# Altium PCB MainPCB.PcbDoc (part 2 of 4)
Units mm, origin at the board's own origin, x right, y up, seen from the top; angles counter-clockwise.
Board outline 219.96 x 164.97 mm, 2 copper layers (Top Layer, Bottom Layer); 298 components, 220 nets, 976 pads, 1045 vias.
Unrouted connection lines stored in the file: 1.
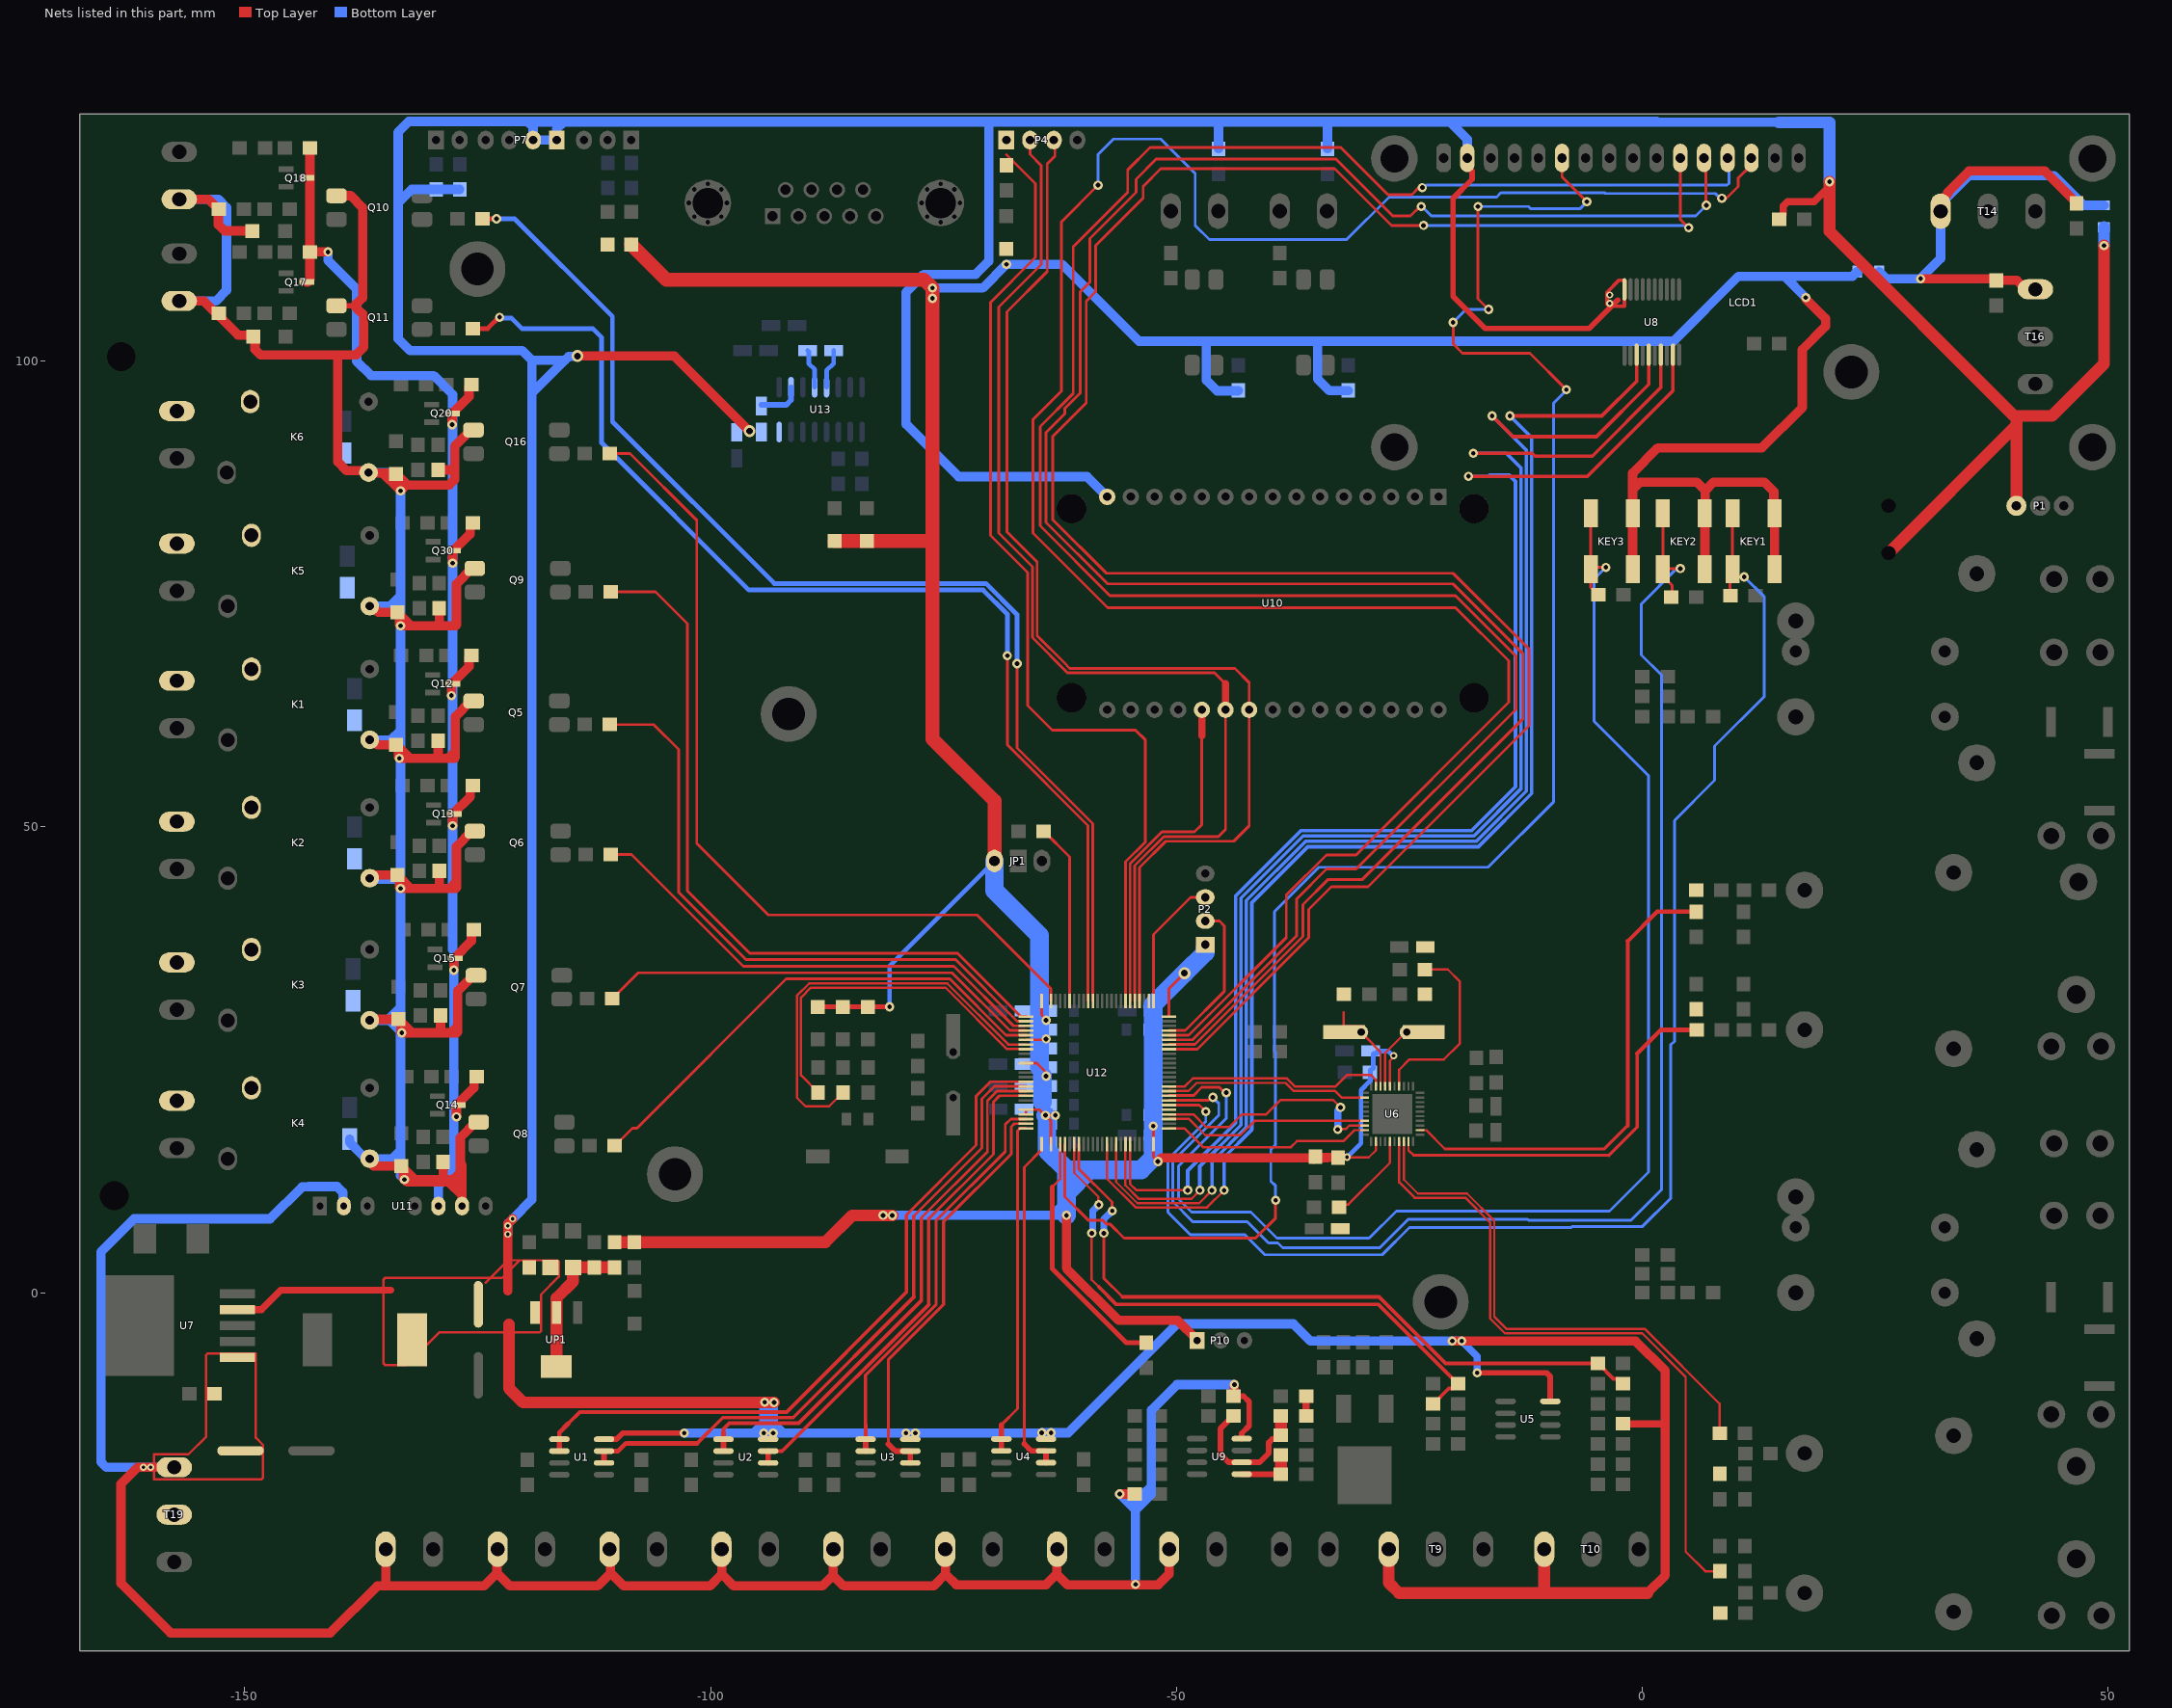
[diagram p2: the nets of this part, all layers, seen from the top]

## Via types
v1: diameter 0.762, hole 0.381, Top Layer to Bottom Layer, tented both sides, 733 vias
v2: diameter 1, hole 0.5, Top Layer to Bottom Layer, tented both sides, 230 vias
v3: diameter 1, hole 0.5, Top Layer to Bottom Layer, 35 vias
v4: diameter 1.2, hole 0.6, Top Layer to Bottom Layer, tented both sides, 28 vias
v5: diameter 0.8, hole 0.4, Top Layer to Bottom Layer, tented both sides, 10 vias
v6: diameter 1.27, hole 0.711, Top Layer to Bottom Layer, tented both sides, 4 vias
v7: diameter 0.6, hole 0.3, Top Layer to Bottom Layer, tented both sides, 3 vias
v8: diameter 1.27, hole 0.711, Top Layer to Bottom Layer, 1 vias
v9: diameter 0.9, hole 0.45, Top Layer to Bottom Layer, tented both sides, 1 vias

## Nets (pads, with @x,y where several pads share a name; then routed paths per layer and width w, separated by ;. In a path a pad name is that pad's centre, name@x,y a point inside that pad or via, vN(x,y) a via of type N, cw(c..) or ccw(c..) an arc to the next point about the centre after c; other vN are vias at no path point)
3.3v-ADE: C25.1 C26.2 C27.1 C29.2 C36.2 C37.2 C38.2 C39.2 C40.2 C41.1 C43.2 C44.2 C45.2 C46.2 C52.1 C53.1 C54.1 C55.1 C56.1 D15.1 D16.1 D17.1 D18.1 D19.1 D20.1 D24.1 D25.1 JP1.3 KEY1.2 KEY2.2 KEY3.2 P2.1 P10.1 R18.2 R20.2 R29.2 R30.2 R44.2 R94.2 U6.2 U6.26 U12.6 U12.11 U12.21 U12.22 U12.28 U12.50 U12.75 U12.100 | length 563.7
  Top Layer w0.25: R44.2@-32.681,14.511 -32.658,14.534 v5(-31.703,14.534) -31.68,14.511 -29.382,14.511 -28.61,15.283 U6.2@-28.61,16.218 ; U6.26@-27.11,22.166 -27.11,24.878 -26.703,25.285 v5(-26.703,25.434)
  Top Layer w0.3: U12.22@-66.163,19.137 U12.21@-66.163,19.637 -64.73,19.637 v2@-64.096,19.002 ; U12.11@-66.163,24.637 -65.006,24.637 v2@-63.603,23.234 ; U12.6@-66.163,27.137 -63.9,27.137 v2@-63.803,27.234 ; U12.100@-64.493,31.947 -64.483,31.937 U12.100@-64.483,31.317 -64.483,29.814 v2@-63.903,29.234 ; U12.28@-63.483,15.957 -63.483,18.453 v2(-64.064,19.034) v2(-63.003,19.034) ; v2@-52.483,17.881 U12.50@-52.483,15.957 -52.483,14.564 v2(-52.003,14.084) ; U12.75@-50.803,29.637 -50.803,32.636 v6(-49.149,34.29)
  Top Layer w0.5: D25.1@-88.503,30.684 D24.1@-85.803,30.684 D15.1@-83.103,30.684 v2(-80.803,30.684)
  Top Layer w1: v2(-61.817,8.301) -61.817,2.619 -56.227,-2.971 -49.892,-2.971 -47.797,-5.066 P10.1@-47.797,-5.13 ; v2(-52.003,14.084) -51.617,14.47 -35.34,14.47 -35.312,14.442 -35.312,14.298 C27.1@-35.076,14.534 ; C27.1@-35.115,14.573 C27.1@-35.076,14.534 ; -33.886,14.534 R44.2@-32.658,14.534 ; -33.845,14.493 -35.035,14.493 C27.1@-35.076,14.534 ; KEY3.2@-1.052,77.645 KEY3.2@-1.052,83.645 -1.052,87.975 1.651,90.678 12.827,90.678 17.145,94.996 17.145,101.219 19.652,103.726 19.652,104.554 17.526,106.68 v3(17.526,106.807) ; -1.052,86.197 -0.254,86.995 5.842,86.995 6.731,86.106 ; KEY2.2@6.695,83.645 6.695,77.633 KEY2.2@6.731,77.597 ; KEY2.2@6.731,83.693 6.731,86.106 ; KEY1.2@14.188,83.645 14.188,77.633 KEY1.2@14.224,77.597 ; KEY1.2@14.224,83.566 14.097,83.693 14.097,85.979 13.081,86.995 7.62,86.995 6.731,86.106
  Top Layer w1.27: R29.2@-110.331,5.413 R30.2@-108.172,5.413 -87.692,5.413 -84.82,8.285 v2(-80.502,8.285)
  Top Layer w1.5: D18.1@-108.521,112.492 -104.763,108.734 -77.103,108.734 v2(-76.203,107.834) v2(-76.203,106.734) -76.203,80.734 -76.203,80.688 ; D20.1@-86.677,80.688 D19.1@-83.248,80.688 -76.203,80.688 ; JP1.3@-69.543,46.334 -69.543,52.774 -76.203,59.434 -76.203,80.688
  Bottom Layer w0.5: v2(-80.803,30.684) -80.803,35.074 JP1.3@-69.543,46.334 ; v5(-31.703,14.534) -30.203,16.034 -30.203,21.734 -29.203,22.734 C26.2@-29.203,23.934 ; C26.2@-28.903,24.034 -28.903,25.598 -28.85,25.65 -28.461,25.65 -28.461,25.888 -28.408,25.941 -27.291,25.941 -26.784,25.434 v5(-26.703,25.434)
  Bottom Layer w1: v2(-81.502,8.301) v2@-80.518,8.301 ; v2(-80.502,8.285) v2@-80.518,8.301 ; v2(-76.203,106.734) v2(-76.203,107.834) -70.806,107.834 v2(-68.262,110.378) -62.293,110.378 -54.038,102.123 -46.799,102.123 ; v2(-61.817,8.301) -63.327,8.301 ; -61.803,9.825 -63.327,8.301 ; R18.2@-43.37,96.836 -43.417,96.789 -45.656,96.789 -46.799,97.932 -46.799,102.123 ; R20.2@-31.559,96.836 -33.638,96.836 -34.861,98.059 -34.861,102.123 ; 13.462,109.084 10.296,109.084 3.336,102.123 -34.861,102.123 ; 13.462,109.093 15.24,109.093 v3(17.526,106.807) ; 15.24,109.084 22.533,109.084 22.9,109.451 23.025,109.451 23.05,109.476 R94.2@23.05,109.601 ; v2@-80.518,8.301 -63.327,8.301 ; -46.799,102.123 -34.861,102.123
  Bottom Layer w2: JP1.3@-69.543,46.334 -69.543,43.174 -64.703,38.334 -64.703,30.241 ; -64.703,24.199 -64.703,29.834 ; -64.403,20.434 v2@-64.403,23.289 ; v2(-64.064,19.034) -63.903,18.873 -63.903,15.284 -61.803,13.184 ; v2(-61.817,8.301) -61.803,8.315 -61.803,9.825 -61.803,10.714 ; P2.1@-46.926,37.034 -46.926,36.513 v6(-49.149,34.29) -52.514,30.925 C56.1@-52.514,30.241 -52.503,30.23 v2(-52.503,17.881) -52.503,14.484 -53.803,13.184 -59.333,13.184 ; -61.803,10.714 -61.803,13.184 ; -61.803,10.714 -59.333,13.184 ; -61.803,13.184 -59.333,13.184
  other v2: -64.003,23.234 -64.003,27.234 -64.003,29.234
3v3: C6.2 C7.2 R29.1 UP1.2 UP1.4 | length 16.3
  Top Layer w1: C6.2@-115.151,2.388 -114.826,2.713 C6.2@-114.776,2.713
  Top Layer w1.27: UP1.4@-116.554,-7.934 UP1.2@-116.554,-2.134 -116.554,-0.589 -114.776,1.189 C6.2@-114.776,2.713 C7.2@-112.49,2.713 R29.1@-110.331,2.713
5-volt: 1.2 C4.2 C5.2 C9.1 C50.1 L1.1 LCD1.2 P1.1 P7.1 P7.2 R23.2 R32.2 R86.2 R87.2 R95.2 R100.2 R101.2 T9.1 T10.1 T18.2 U1.8 U2.8 U3.8 U4.8 U5.8 U7.4 U8.20 U10.15 U13.16 UP1.3 | length 1017.2
  Top Layer w0.254: L1.1@-132.048,-5.067 -132.048,-6.337 L1.1@-131.62,-6.765 ; L1.1@-130.587,-7.798 L1.1@-131.62,-6.765 ; -124.174,1.062 -123.666,1.57 ; L1.1@-131.62,-6.765 -129.127,-4.272 -121.634,-4.272 -118.354,-4.272 -118.205,-4.123 -118.205,-0.208 -116.3,1.697 -116.3,3.326 -116.449,3.475 -120.491,3.475 ; L1.1@-131.62,-6.765 -132.619,-7.764 -134.947,-7.764 -135.096,-7.616 -135.096,0.267 -135.096,1.421 -134.947,1.57 -123.666,1.57 ; -123.666,1.57 -121.761,3.475 -120.491,3.475 ; -123.666,1.57 -122.396,1.57 -121.761,2.205 -120.491,3.475
  Top Layer w0.381: v1@-3.803,106.107 -3.803,107.384 -2.503,108.684 -2.491,108.672 -1.96,108.672 -1.928,108.64 U8.20@-1.928,107.684 -1.928,105.884 -3.58,105.884 v1@-3.803,106.107
  Top Layer w0.6: LCD1.2@-18.669,121.793 -18.669,120.781 -18.288,120.4 -18.288,119.507 -20.32,117.475 -20.32,106.934 -16.891,103.505 -5.715,103.505 -2.667,106.553
  Top Layer w0.61: U1.8@-111.442,-15.733 -110.108,-15.733 -109.442,-15.067 v2(-102.838,-15.067) ; v2(-17.748,-8.607) -10.297,-8.607 -9.887,-9.017 U5.8@-9.887,-11.671
  Top Layer w0.762: U7.4@-152.191,-1.81 -148.222,-1.81 -146.145,0.267 -135.096,0.267 -134.334,0.267 ; R32.2@-2.094,-14.084 2.318,-14.084 2.445,-14.211 ; R23.2@14.652,115.189 14.702,115.189 15.046,115.533 15.046,115.583 15.113,115.65 15.113,116.648 15.559,117.094 18.415,117.094 20.066,118.745 v3@20.066,119.38
  Top Layer w1: -121.761,0.173 -121.761,2.205 -121.761,3.475 v1(-121.761,6.269) v1(-121.761,7.158) -121.761,7.412 v1(-121.253,7.92) ; v6(-114.303,100.534) -103.884,100.534 v6(-95.821,92.471) ; v2(-20.415,-5.194) v2(-19.399,-5.194) -0.73,-5.194 2.445,-8.369 2.445,-14.211 2.445,-30.34 0.54,-32.245
  Top Layer w1.27: -121.634,-3.416 -121.634,-4.272 -121.634,-10.274 -120.127,-11.781 v2(-93.202,-11.781) ; T9.1@-27.241,-27.544 -27.241,-31.134 -26.13,-32.245 -10.54,-32.245 ; T10.1@-10.54,-27.544 -10.54,-32.245 ; 0.54,-32.245 -10.54,-32.245 ; v3(20.066,119.253) 20.066,113.919 39.878,94.107 ; T18.2@26.416,79.375 39.878,92.837 ; P1.1@40.132,84.455 40.132,93.98 40.005,94.107 39.878,94.107 ; v3(49.53,112.395) 49.53,99.695 43.942,94.107 39.878,94.107
  Bottom Layer w0.762: v2(-19.399,-5.194) -17.748,-6.845 v2(-17.748,-8.607)
  Bottom Layer w1: R86.2@-126.936,118.426 R87.2@-129.476,118.426 -132.096,118.426 -133.54,116.982 ; v1(-121.761,6.269) v1(-121.761,7.158) -121.761,7.412 v1(-121.253,7.92) -119.189,9.984 ; -119.189,9.952 -119.189,9.984 ; -119.189,10.46 -119.189,9.984 ; v6(-114.303,100.534) -114.355,100.482 -115.242,100.482 -115.633,100.091 ; v2@-102.838,-15.066 -95.345,-15.066 ; v2@-64.463,-15.066 v2(-78.037,-15.066) v2(-79.037,-15.066) -92.279,-15.066 ; v2(-64.463,-15.043) v2(-63.463,-15.043) -61.63,-15.043 -49.939,-3.352 -37.464,-3.352 -35.622,-5.194 v2(-20.415,-5.194) v2(-19.399,-5.194) ; U10.15@-57.449,85.421 -59.608,87.58 -73.387,87.58 -79.039,93.232 -79.039,107.392 -77.134,109.297 -71.546,109.297 -70.149,110.694 -70.149,125.634 ; R101.2@-45.503,122.784 -45.503,125.634 ; R100.2@-33.803,122.784 -33.803,125.634 ; LCD1.2@-18.669,121.666 LCD1.2@-18.796,121.793 -18.796,123.802 -20.701,125.707 ; 1.524,125.707 -20.701,125.707 ; 14.609,125.599 14.574,125.634 -33.803,125.634 ; -133.54,116.982 -133.54,124.564 -132.397,125.707 -119.648,125.707 ; -133.54,116.982 -133.54,102.377 -132.27,101.107 -120.205,101.107 -119.189,100.091 ; -119.648,125.707 -20.701,125.707 ; -119.648,125.707 -119.575,125.634 ; -119.575,125.634 -115.803,125.634 ; -119.575,125.634 -119.062,125.121 P7.2@-119.062,123.713 P7.1@-116.522,123.713 -116.522,124.915 -115.803,125.634 ; -119.189,9.984 -119.189,94.808 -119.189,96.535 ; -119.189,96.535 -115.633,100.091 ; -119.189,96.535 -119.189,100.091 ; -119.189,100.091 -115.633,100.091 ; -115.803,125.634 -70.149,125.634 ; -95.345,-15.066 v2(-94.294,-15.066) ; -95.345,-15.066 -94.33,-14.051 -94.294,-14.051 ; v2(-94.294,-15.066) -94.294,-14.051 ; v2(-94.294,-15.066) v2(-93.294,-15.066) ; -94.294,-14.051 -94.294,-11.857 v2(-94.202,-11.765) -94.186,-11.781 v2(-93.202,-11.781) -93.294,-11.873 -93.294,-14.051 ; -94.294,-14.051 -93.294,-14.051 ; v2(-93.294,-15.066) -93.294,-14.051 ; v2(-93.294,-15.066) -92.279,-15.066 ; -93.294,-14.051 -92.279,-15.066 ; -70.149,125.634 -45.503,125.634 ; -45.503,125.634 -33.803,125.634
  Bottom Layer w1.27: 14.609,125.599 20.066,125.599 v3(20.066,119.253) ; v3(49.53,112.395) R95.2@49.53,114.363
  other v1: -3.503,106.184 -3.503,107.084
5v-out-relay: Q12.3 Q13.3 Q14.3 Q15.3 Q17.3 Q18.3 Q20.3 Q30.3 R15.2 R16.2 R45.2 R46.2 R48.2 R49.2 R54.2 R55.2 U11.6 | length 160.6
  Top Layer w1: Q17.3@-143.362,108.473 -143.262,108.473 -143.014,108.721 R55.2@-143.014,111.71 ; R54.2@-143.014,122.886 R55.2@-143.014,111.71 ; v2(-141.062,111.71) R55.2@-143.014,111.71 ; v2(-127.818,64.086) -127.818,65.323 -125.93,67.211 -125.93,68.178 -125.705,68.403 R45.2@-125.655,68.403 ; v2(-127.741,93.182) Q20.3@-127.741,94.376 -125.937,96.18 -125.937,97.261 -125.712,97.486 R16.2@-125.662,97.486 ; v2(-127.698,78.31) -127.698,79.547 -125.81,81.435 -125.81,82.402 -125.585,82.627 R15.2@-125.535,82.627 ; v2(-127.691,50.116) -127.691,51.353 -125.803,53.241 -125.803,54.208 -125.578,54.433 R46.2@-125.528,54.433 ; v2(-127.564,34.622) -127.564,35.859 -125.676,37.747 -125.676,38.714 -125.451,38.939 R48.2@-125.401,38.939 ; v2(-127.282,18.874) -127.282,20.111 -125.394,21.999 -125.394,22.966 -125.169,23.191 R49.2@-125.119,23.191
  Bottom Layer w1: v2(-141.062,111.71) -141.062,110.788 -137.985,107.711 -137.985,99.964 -136.461,98.44 -129.73,98.44 -127.698,96.408 -127.698,93.182 -127.698,81.232 v2(-127.698,78.31) -127.698,64.206 v2(-127.818,64.086) -127.691,63.959 -127.691,36.838 ; U11.6@-129.222,9.286 -129.222,11.445 -127.571,13.096 -127.571,21.732 -127.571,36.718 ; v2(-127.741,93.182) v2@-127.727,93.168
12-volt: C8.1 C10.2 C31.2 R105.1 T1.1 T2.1 T3.1 T4.1 T5.1 T6.1 T7.1 T8.1 T19.1 U7.1 U9.8 U11.2 | length 320.8
  Top Layer w0.254: -159.734,-20.02 -159.734,-18.75 -159.734,-17.353 -156.051,-17.353 -154.146,-15.448 -154.146,-6.691 -153.997,-6.542 -148.812,-6.542 -148.812,-6.691 -148.812,-15.575 -148.05,-16.337 -148.05,-19.871 -148.199,-20.02 -159.734,-20.02
  Top Layer w0.61: C31.2@-43.903,-11.116 -42.803,-11.116 -42.213,-11.706 -42.213,-14.305 -43.003,-15.096 U9.8@-43.003,-15.676
  Top Layer w1: T19.1@-157.575,-18.75 -159.734,-18.75 -161.512,-18.75 -163.29,-20.528 -163.29,-31.196 -157.956,-36.53 -140.81,-36.53 -135.761,-31.481 -134.872,-31.481 ; T1.1@-134.872,-27.545 -134.872,-31.481 ; T2.1@-122.934,-28.233 -122.934,-30.084 ; T2.1@-122.861,-28.233 T2.1@-122.861,-27.545 ; T3.1@-110.851,-27.545 -110.742,-27.654 -110.742,-30.084 ; T4.1@-98.84,-27.545 -98.804,-27.581 -98.804,-30.211 ; T5.1@-86.83,-27.545 -86.866,-27.581 -86.866,-30.338 ; T6.1@-74.819,-27.545 -74.801,-27.563 -74.801,-30.211 ; T7.1@-62.809,-27.545 -62.863,-27.6 -62.863,-30.211 ; v2(-56.103,-21.616) R105.1@-54.503,-21.616 ; T8.1@-50.798,-27.545 -50.798,-30.211 -51.941,-31.354 -61.72,-31.354 -62.863,-30.211 ; C31.2@-43.903,-11.116 -43.803,-11.016 v2(-43.803,-9.88) ; -134.872,-31.481 -124.331,-31.481 -122.934,-30.084 ; -122.934,-30.084 -121.537,-31.481 -112.139,-31.481 -110.742,-30.084 ; -110.742,-30.084 -109.345,-31.481 -100.074,-31.481 -98.804,-30.211 ; -98.804,-30.211 -97.534,-31.481 -88.009,-31.481 -86.866,-30.338 ; -86.866,-30.338 -85.723,-31.481 -76.071,-31.481 -74.801,-30.211 ; -74.801,-30.211 -73.658,-31.354 -64.006,-31.354 -62.863,-30.211
  Bottom Layer w1: T19.1@-157.575,-18.75 v1(-160.115,-18.75) v1(-160.877,-18.75) -164.863,-18.75 -165.449,-18.164 -165.449,4.364 -161.893,7.92 -147.288,7.92 -143.859,11.349 -143.165,11.349 -143.128,11.386 -140.1,11.386 -139.478,10.763 -139.478,9.382 U11.2@-139.382,9.286 ; v2(-54.403,-31.316) -54.403,-23.316 ; -52.703,-20.316 -52.703,-20.766 ; v2(-43.803,-9.88) -49.967,-9.88 -52.703,-12.616 -52.703,-20.766 ; -54.403,-23.316 -52.703,-21.616 ; -54.403,-23.316 -54.403,-21.616 ; -54.403,-23.316 v2(-56.103,-21.616) -54.403,-21.616 ; -54.403,-21.616 -53.553,-21.616 ; -53.553,-21.616 -52.703,-21.616 ; -53.553,-21.616 -52.703,-20.766 ; -52.703,-21.616 -52.703,-20.766
#DB1: R96.1 U12.7 | length 44.8
  Top Layer w0.25: R96.1@-85.803,21.484 -85.803,21.434 -86.403,20.834 -86.453,20.834 -87.278,20.009 -89.828,20.009 -90.753,20.934 -90.753,31.87 -89.428,33.195 -74.614,33.195 -68.056,26.637 U12.7@-66.163,26.637
#DB2: R97.1 U12.8 | length 38.3
  Top Layer w0.25: R97.1@-88.503,21.484 -88.503,21.534 -90.303,23.334 -90.303,31.684 -89.242,32.745 -74.8,32.745 -68.192,26.137 U12.8@-66.163,26.137
#NodeMCU-SS: U10.20 U12.81 | length 39.3
  Top Layer w0.3: U12.81@-54.983,31.317 -54.983,46.037 -51.564,49.456 -48.075,49.456 -47.289,50.242 U10.20@-47.289,62.561
  Top Layer w0.762: -47.289,59.767 U10.20@-47.289,62.561
#TACHO1: U8.3 U12.40 | length 144.8
  Top Layer w0.254: U12.40@-57.483,15.957 -57.483,12.238 -54.394,9.149 -46.727,9.149 -44.903,10.973 v2(-44.903,10.984)
  Top Layer w0.381: v2(-14.224,94.107) -4.358,94.107 -0.628,97.837 U8.3@-0.628,100.684
  Bottom Layer w0.381: v2(-44.903,10.984) -44.903,14.527 -41.927,17.503 -41.927,41.858 -35.926,47.858 -17.608,47.858 -11.885,53.581 -11.885,91.768 v2(-14.224,94.107)
#TACHO2: U8.5 U12.42 | length 148.5
  Top Layer w0.254: U12.42@-56.483,15.957 -56.483,11.88 -54.206,9.603 -47.573,9.603 -46.203,10.973 v2(-46.203,10.984)
  Top Layer w0.381: v2(-16.129,94.107) -14.614,92.592 -13.906,91.884 -4.938,91.884 0.672,97.494 U8.5@0.672,100.684
  Bottom Layer w0.381: v2(-46.203,10.984) -46.203,14.048 -42.508,17.743 -42.508,42.099 -36.167,48.439 -17.848,48.439 -12.466,53.821 -12.466,90.444 v2(-16.129,94.107)
#TACHO3: U8.7 U12.44 | length 148.6
  Top Layer w0.254: U12.44@-55.483,15.957 -55.483,11.522 -54.018,10.057 -48.419,10.057 -47.503,10.973 v2(-47.503,10.984)
  Top Layer w0.381: v2(-18.161,90.106) -11.85,90.106 -11.533,89.789 -5.39,89.789 1.972,97.151 U8.7@1.972,100.684
  Bottom Layer w0.381: v2(-47.503,10.984) -47.503,13.57 -43.089,17.984 -43.089,42.339 -36.408,49.02 -18.089,49.02 -13.047,54.062 -13.047,88.548 -14.605,90.106 v2(-18.161,90.106)
#TACHO4: U8.9 U12.45 | length 147.7
  Top Layer w0.254: -54.983,13.811 -54.983,13.291 ; U12.45@-54.983,15.957 -54.983,13.291 ; v2(-48.803,10.984) -54.303,10.984 -54.983,11.664 -54.983,13.291
  Top Layer w0.381: v2(-18.669,87.63) -5.905,87.63 3.272,96.807 U8.9@3.272,100.684
  Bottom Layer w0.381: v2(-48.803,10.984) -48.803,13.092 -43.67,18.225 -43.67,42.58 -36.648,49.601 -18.33,49.601 -13.628,54.303 -13.628,87.066 -14.346,87.784 -16.347,87.784 -16.501,87.63 v2(-18.669,87.63)
@DAC-OUT: R116.2 U12.30 | length 31.7
  Top Layer w0.254: -63.341,11.349 -62.483,12.207 ; -62.483,15.032 -62.483,12.207 ; U12.30@-62.483,15.957 -62.483,12.207
  Top Layer w0.508: -63.341,11.349 -63.341,2.586 ; -62.071,1.316 -63.341,2.586 ; R116.2@-53.258,-5.384 -55.371,-5.384 -63.341,2.586
ADC1: U1.1 U1.2 U12.15 | length 76.4
  Top Layer w0.3: -78.993,8.334 -71.503,15.824 -71.503,21.096 -69.962,22.637 U12.15@-66.163,22.637
  Top Layer w0.35: -78.993,0.044 -78.993,8.334
  Top Layer w0.4: -115.278,-14.041 -114.053,-12.816 -91.853,-12.816 -78.993,0.044
  Top Layer w0.5: U1.1@-116.242,-15.733 -116.242,-15.005 -115.278,-14.041
  Top Layer w0.6: U1.2@-116.242,-17.003 U1.1@-116.242,-15.733 U1.1@-115.442,-15.733
ADC2: U1.6 U1.7 U12.16 | length 70.9
  Top Layer w0.3: -78.203,8.235 -70.903,15.535 -70.903,20.796 -69.562,22.137 U12.16@-66.163,22.137
  Top Layer w0.35: -78.203,-0.466 -78.203,8.235
  Top Layer w0.4: -101.454,-16.167 -98.703,-13.416 -91.153,-13.416 -78.203,-0.466
  Top Layer w0.5: U1.7@-111.442,-17.003 -109.94,-17.003 -109.104,-16.167 -101.454,-16.167
  Top Layer w0.6: U1.6@-111.442,-18.273 U1.7@-111.442,-17.003
ADC3: U2.1 U2.2 U12.17 | length 59.1
  Top Layer w0.3: -77.403,8.019 -70.303,15.119 -70.303,20.596 -69.262,21.637 U12.17@-66.163,21.637
  Top Layer w0.35: -77.403,-0.866 -77.403,8.019
  Top Layer w0.4: -98.633,-15.005 -98.633,-14.646 -98.003,-14.016 -90.553,-14.016 -77.403,-0.866
  Top Layer w0.5: U2.1@-98.633,-15.733 -98.633,-15.005
  Top Layer w0.6: U2.2@-98.633,-17.003 U2.1@-98.633,-15.733 U2.1@-97.833,-15.733
ADC4: U2.6 U2.7 U12.18 | length 53.4
  Top Layer w0.3: -76.603,7.93 -69.668,14.865 -69.668,20.469 -69,21.137 U12.18@-66.163,21.137
  Top Layer w0.35: -76.603,-1.266 -76.603,7.93
  Top Layer w0.4: U2.7@-93.833,-17.003 -92.34,-17.003 -76.603,-1.266
  Top Layer w0.6: U2.6@-93.833,-18.273 U2.7@-93.833,-17.003
ADC5: U3.1 U3.2 U12.23 | length 43.7
  Top Layer w0.3: -75.803,7.734 -68.389,15.148 -68.389,18.049 -67.801,18.637 U12.23@-66.163,18.637
  Top Layer w0.35: -83.376,-14.222 -83.376,-8.852 -75.803,-1.279 -75.803,7.734
  Top Layer w0.4: U3.1@-83.376,-15.733 -83.376,-14.222
  Top Layer w0.6: U3.2@-83.376,-17.003 U3.1@-83.376,-15.733
ADC6: U3.6 U3.7 U12.24 | length 45.2
  Top Layer w0.3: -75.003,7.634 -67.754,14.883 -67.754,17.795 -67.412,18.137 U12.24@-66.163,18.137
  Top Layer w0.35: -80.925,-16.266 -80.925,-7.179 -75.003,-1.257 -75.003,7.634
  Top Layer w0.6: -80.925,-16.266 -80.188,-17.003 U3.7@-78.576,-17.003 U3.6@-78.576,-18.273
ADC7: U4.1 U4.2 U12.25 | length 36.1
  Top Layer w0.3: -68.802,-14.199 -67.053,-12.45 -67.053,17.367 -66.783,17.637 U12.25@-66.163,17.637
  Top Layer w0.6: U4.2@-68.802,-16.98 U4.1@-68.802,-15.71 -68.802,-14.199
ADC8: U4.6 U4.7 U12.26 | length 36.9
  Top Layer w0.3: -66.351,-16.243 -66.351,13.472 -64.506,15.317 -64.503,15.317 -64.483,15.337 U12.26@-64.483,15.957
  Top Layer w0.6: -66.351,-16.243 -65.614,-16.98 U4.7@-64.002,-16.98 U4.6@-64.002,-18.25
ADC9: C1.2 R9.1 U12.33 | length 63.5
  Top Layer w0.254: U12.33@-60.983,15.957 -60.983,12.864 -58.403,10.284 -58.403,9.492 v2(-58.349,9.438) ; v2(-59.103,6.384) -59.103,1.384 -58.353,0.634
  Top Layer w0.4: -58.353,0.634 -56.453,-1.266 -28.33,-1.266 -19.83,-9.766 C1.2@-19.78,-9.766 -20.305,-10.291 -20.796,-10.291 -22.43,-11.925 R9.1@-22.48,-11.925
  Bottom Layer w0.254: v2(-59.103,6.384) v2@-59.003,6.484
  Bottom Layer w0.762: v2@-59.003,6.484 -59.003,8.784 v2(-58.349,9.438)
ADC10: C2.2 R10.1 U12.34 | length 76.7
  Top Layer w0.3: U12.34@-60.483,15.957 -60.483,13.279 -56.938,9.734 -56.938,8.819 v2(-56.903,8.784) ; v2(-57.803,6.384) -57.803,1.534 -55.803,-0.466
  Top Layer w0.4: -55.803,-0.466 -28.281,-0.466 -21.14,-7.607 C2.2@-4.794,-7.607 -4.744,-7.607 -3.11,-9.241 -2.619,-9.241 R10.1@-2.094,-9.766
  Bottom Layer w0.762: v2(-57.803,6.384) -57.803,7.884 v2(-56.903,8.784)
AVDD: C15.1 C17.2 U6.24 | length 20.4
  Top Layer w0.25: U6.24@-26.11,22.166 -26.11,23.927 -25.003,25.034 -21.303,25.034 -19.621,26.716 -19.621,33.416 -20.891,34.686 C17.2@-23.351,34.686
BOOT0: R84.2 U12.94 | length 19.4
  Top Layer w0.3: R84.2@-64.253,49.534 -61.483,46.764 U12.94@-61.483,31.317
CLKIN: C20.2 pad.8@-25.304,27.955 U6.27 Y1.2 | length 8.6
  Top Layer w0.25: U6.27@-27.61,22.166 -27.61,25.737 -25.745,27.601 -25.689,27.601 -25.336,27.955 Y1.2@-23.499,27.955
CLKOUT: C24.2 pad.9@-30.194,27.955 U6.28 Y1.1 | length 11.2
  Top Layer w0.25: -32.067,30.114 -32.067,28.58 -30.025,28.58 -29.949,28.504 -29.949,28.151 -29.874,28.075 -29.881,28.068 -29.881,27.412 -29.683,27.412 -28.11,25.839 U6.28@-28.11,22.166 ; Y1.1@-31.999,27.955 Y1.1@-31.686,27.955
CS-ADE: U6.39 U12.51 | length 22.6
  Top Layer w0.25: U12.51@-50.803,17.637 -49.181,17.637 -47.165,15.621 -37.719,15.621 -37.084,16.256 -32.082,16.256 -30.896,17.442 U6.39@-29.834,17.442
CS-ADE2: U12.55
CS-FREE: P4.1 R88.1 U12.82 | length 107.1
  Top Layer w0.3: -68.262,122.15 -65.151,119.039 -65.151,111.125 -69.977,106.299 -69.977,81.28 -65.976,77.279 -65.976,63.006 -63.353,60.383 -54.414,60.383 -53.34,59.309 -53.34,48.387 -55.483,46.244 U12.82@-55.483,31.317
D4: LCD1.11 U12.68 | length 229.6
  Top Layer w0.3: U12.68@-50.803,26.137 -47.777,26.137 -35.814,38.1 -35.814,41.148 -33.401,43.561 -29.464,43.561 -12.192,60.833 -12.192,69.088 -20.32,77.216 -57.531,77.216 -63.309,82.994 -63.309,91.885 -59.69,95.504 -59.69,106.426 -58.674,107.442 -58.674,112.395 -53.594,117.475 -53.594,118.745 -51.689,120.65 -33.02,120.65 -26.924,114.554 v3(-23.495,114.554) ; LCD1.11@4.191,121.793 4.064,121.666 4.064,115.189 v3(4.953,114.3)
  Bottom Layer w0.3: v3(-23.495,114.554) 4.51,114.554 4.764,114.3 v3(4.953,114.3)
D5: LCD1.12 U12.69 | length 230.4
  Top Layer w0.3: U12.69@-50.803,26.637 -48.934,26.637 -48.039,26.637 -36.449,38.227 -36.449,41.656 -33.782,44.323 -30.099,44.323 -12.827,61.595 -12.827,68.58 -20.32,76.073 -57.404,76.073 -64.008,82.677 -64.008,92.329 -61.976,94.361 -61.976,94.924 -60.325,96.575 -60.325,107.442 -59.309,108.458 -59.309,113.157 -54.356,118.11 -54.356,119.507 -52.197,121.666 -32.893,121.666 -26.797,115.57 -24.892,115.57 -23.876,116.586 v3(-23.749,116.586) ; LCD1.12@6.731,121.793 6.794,121.73 6.794,116.776 v3(6.858,116.713)
  Bottom Layer w0.3: v3(-23.749,116.586) -23.676,116.586 -22.66,115.57 5.715,115.57 v3(6.858,116.713)
D6: LCD1.13 U12.70 | length 229.7
  Top Layer w0.3: U12.70@-50.803,27.137 -48.301,27.137 -37.12,38.318 -37.12,42.255 -33.909,45.466 -30.734,45.466 -13.589,62.611 -13.589,68.326 -20.066,74.803 -57.15,74.803 -64.643,82.296 -64.643,92.964 -61.087,96.52 -61.087,112.268 -55.245,118.11 -55.245,120.523 -52.832,122.936 -32.385,122.936 -27.305,117.856 -24.765,117.856 -24.003,118.618 v3(-23.622,118.618)
  Bottom Layer w0.3: v3(-23.622,118.618) -23.433,118.618 -23.179,118.872 9.095,118.872 9.271,119.048 LCD1.13@9.271,121.793
D7: LCD1.14 U12.71 | length 242.4
  Top Layer w0.3: v3(-58.42,118.872) -62.357,114.935 -62.357,96.774 -65.405,93.726 -65.405,81.534 -57.404,73.533 -20.066,73.533 -14.351,67.818 -14.351,63.373 -30.734,46.99 -33.909,46.99 -38.227,42.672 -38.227,38.1 -48.69,27.637 U12.71@-50.803,27.637 ; v3(8.509,117.475) 8.636,117.348 8.89,117.348 10.287,118.745 10.287,119.634 11.684,121.031 LCD1.14@11.684,121.793
  Bottom Layer w0.3: v3(-58.42,118.872) -58.42,122.174 -56.769,123.825 -51.689,123.825 -48.006,120.142 -48.006,114.554 -46.482,113.03 -31.75,113.03 -27.178,117.602 -15.638,117.602 -15.196,118.044 -4.037,118.044 -3.976,117.983 7.812,117.983 8.32,117.475 v3(8.509,117.475)
ds18b20-PW: R22.2 R25.2 R94.1 R95.1 T14.3 T16.3 | length 65.2
  Top Layer w1: v3(29.845,108.839) 37.799,108.839 R25.2@37.973,108.665 40.198,108.665 41.167,107.696 T16.3@42.037,107.696 ; T14.3@32.004,116.078 32.004,117.217 32.766,117.979 32.766,118.11 35.052,120.396 43.183,120.396 46.609,116.97 R22.2@46.609,116.92
  Bottom Layer w1: R94.1@25.4,109.601 25.4,109.476 25.425,109.451 25.55,109.451 26.162,108.839 v3(29.845,108.839) 32.004,110.998 T14.3@32.004,116.078 ; T14.3@31.877,116.078 31.877,116.776 34.988,119.888 44.196,119.888 47.371,116.713 R95.1@49.53,116.713
DVDD: C22.1 C23.2 U6.5 | length 9.7
  Top Layer w0.25: C23.2@-32.574,9.159 -32.267,9.466 -31.571,9.466 -27.11,13.927 U6.5@-27.11,16.218
E: LCD1.6 U12.31 | length 194.4
  Top Layer w0.3: U12.31@-61.983,15.957 -61.983,10.294 -59.436,7.747 -57.917,7.747 -57.504,7.334 -57.118,7.334 -55.626,5.842 -41.529,5.842 -39.37,8.001 v3(-39.37,9.906) ; v3(-20.32,104.14) -20.32,101.854 -19.304,100.838 -12.073,100.838 v3(-8.166,96.932) ; v3(-17.653,116.586) -17.653,106.68 v3(-16.51,105.537) ; LCD1.6@-8.636,121.793 -8.636,119.761 v3(-5.969,117.094)
  Bottom Layer w0.3: v3(-39.37,9.906) -39.37,11.461 -39.878,11.969 -39.878,15.367 -39.37,15.875 -39.37,25.781 -39.497,25.908 -39.497,40.894 -34.735,45.656 -16.574,45.656 -9.525,52.705 -9.525,95.504 -8.128,96.901 -8.159,96.932 v3(-8.166,96.932) ; v3(-20.32,104.14) -18.923,105.537 v3(-16.51,105.537) ; v3(-17.653,116.586) -12.224,116.586 -11.97,116.332 -6.731,116.332 v3(-5.969,117.094)
Earth: T19.2
GND-out: D4.2 D5.2 D6.2 D7.2 D8.2 D9.2 D10.2 D11.1 D12.1 D13.1 D14.1 D21.2 D22.1 D23.1 K1.C1 K2.C1 K3.C1 K4.C1 K5.C1 K6.C1 Q5.3 Q6.3 Q7.3 Q8.3 Q9.3 Q10.3 Q11.3 Q16.3 R67.1 R71.1 R72.1 R73.1 R78.1 R79.1 R81.1 R82.1 T23.2 T24.2 U11.7 | length 343.4
  Top Layer w0.6: Q11.3@-140.172,105.933 -138.239,105.933 -138.11,105.933 ; Q10.3@-140.172,117.744 Q10.3@-139.128,117.744 ; Q6.3@-125.313,49.545 Q6.3@-125.186,49.545 ; Q7.3@-125.186,34.051 Q7.3@-125.059,34.051 ; Q8.3@-124.904,18.303 Q8.3@-124.777,18.303
  Top Layer w1: T23.2@-157.035,117.363 -153.91,117.363 -152.829,116.282 -152.829,114.634 -152.16,113.965 D10.2@-149.193,113.965 ; T24.2@-155.896,106.441 -154.368,106.441 -150.71,102.783 -149.257,102.783 D9.2@-149.105,102.631 ; D9.2@-149.161,102.575 D9.2@-149.105,102.631 ; -148.313,100.664 -148.899,101.25 -148.899,102.425 D9.2@-149.105,102.631 ; -148.279,100.664 -139.903,100.664 ; Q10.3@-139.128,117.744 -138.62,117.744 -137.35,116.474 -137.35,106.781 -137.936,106.195 -137.977,106.195 -138.11,106.062 -138.11,105.933 ; -138.239,105.933 -137.977,105.671 -137.977,105.663 -137.223,104.909 -137.223,101.484 -138.043,100.664 -139.903,100.664 ; K1.C1@-136.708,59.461 -136.437,59.461 -135.784,58.808 D4.2@-133.754,58.808 D4.2@-133.504,58.558 ; K2.C1@-136.588,44.838 D5.2@-133.627,44.838 D5.2@-133.377,44.588 ; K5.C1@-136.588,73.685 -136.317,73.685 -135.664,73.032 D8.2@-133.634,73.032 D8.2@-133.384,72.782 ; K3.C1@-136.461,29.344 D7.2@-133.5,29.344 D7.2@-133.25,29.094 ; K4.C1@-136.179,13.596 D6.2@-133.218,13.596 D6.2@-132.968,13.346 ; R82.1@-129.251,88.309 -127.567,88.309 -127.473,88.215 ; R67.1@-129.244,59.226 -129.244,57.417 -129.182,57.355 ; R81.1@-129.124,73.45 -129.124,71.641 -129.062,71.579 ; R71.1@-129.117,45.256 -129.117,43.447 -129.055,43.385 ; R73.1@-128.99,29.762 -128.99,27.953 -128.928,27.891 ; R72.1@-128.708,14.014 -128.708,12.205 -128.646,12.143 ; U11.7@-126.682,9.286 -126.682,10.46 ; Q16.3@-125.447,92.598 -125.747,92.598 -127.473,90.872 -127.473,88.215 ; Q5.3@-125.44,63.515 -125.74,63.515 -127.404,61.851 -127.404,58.466 -127.404,58.09 ; Q9.3@-125.32,77.739 -125.62,77.739 -127.284,76.075 -127.284,71.669 -127.374,71.579 -129.062,71.579 ; Q6.3@-125.313,49.545 -125.613,49.545 -127.277,47.881 -127.277,44.115 ; Q7.3@-125.186,34.051 -125.486,34.051 -127.15,32.387 -127.15,28.621 ; Q8.3@-124.904,18.303 -125.204,18.303 -126.868,16.639 -126.868,13.889 ; -139.903,100.664 -140.017,100.55 -140.017,89.169 -139.075,88.227 -136.906,88.227 K6.C1@-136.715,88.036 -136.642,87.964 -135.194,87.964 ; -135.194,87.964 v2@-133.511,86.281 ; -135.194,87.964 -133.834,87.964 D21.2@-133.761,87.891 D21.2@-133.511,87.641 ; v2@-133.511,86.281 v2(-133.286,86.056) -132.651,86.691 -132.561,86.691 ; v2@-133.511,86.281 D21.2@-133.511,87.641 ; D21.2@-133.511,87.641 -132.561,86.691 ; D4.2@-133.504,58.558 -132.301,57.355 ; D4.2@-133.504,58.558 -133.504,57.453 v2(-133.406,57.355) -132.301,57.355 ; D8.2@-133.384,72.782 -132.181,71.579 ; D8.2@-133.384,72.782 -133.384,71.677 v2(-133.286,71.579) -132.181,71.579 ; D5.2@-133.377,44.588 -132.174,43.385 ; D5.2@-133.377,44.588 -133.377,43.483 v2(-133.279,43.385) -132.174,43.385 ; D7.2@-133.25,29.094 -132.047,27.891 ; D7.2@-133.25,29.094 -133.25,27.989 v2(-133.152,27.891) -132.047,27.891 ; D6.2@-132.968,13.346 -131.765,12.143 ; D6.2@-132.968,13.346 -132.968,12.241 v2(-132.87,12.143) ; v2(-132.87,12.143) -132.594,11.867 -128.089,11.867 ; v2(-132.87,12.143) -131.765,12.143 ; -132.561,86.691 -128.044,86.691 -127.473,87.263 -127.473,88.215 ; -132.301,57.355 -129.182,57.355 ; -132.181,71.579 -129.062,71.579 ; -132.174,43.385 -129.055,43.385 ; -132.047,27.891 -128.928,27.891 ; -131.765,12.143 -128.646,12.143 ; -129.182,57.355 -128.139,57.355 ; -129.055,43.385 -128.007,43.385 ; -128.928,27.891 -127.88,27.891 ; -128.646,12.143 -128.365,12.143 ; -128.365,12.143 -128.089,11.867 ; -128.365,12.143 -127.598,12.143 ; -128.139,57.355 -127.494,57.355 -127.404,57.445 -127.404,58.09 ; -128.139,57.355 -127.404,58.09 ; -128.089,11.867 -126.682,10.46 ; -128.089,11.867 -127.322,11.867 ; -128.007,43.385 -127.367,43.385 -127.277,43.475 -127.277,44.115 ; -128.007,43.385 -127.277,44.115 ; -127.88,27.891 -127.15,28.621 ; -127.88,27.891 -127.24,27.891 -127.15,27.981 -127.15,28.621 ; -127.598,12.143 -127.322,11.867 ; -127.598,12.143 -126.958,12.143 ; -127.598,12.143 -126.868,12.873 ; -127.322,11.867 -126.682,11.227 ; -127.322,11.867 -126.682,11.867 ; -126.958,12.143 -126.682,11.867 ; -126.958,12.143 -126.868,12.233 -126.868,12.873 ; -126.868,12.873 -126.868,13.889 ; -126.868,13.889 -126.682,13.703 -126.682,11.867 ; -126.682,10.46 -126.682,11.227 ; -126.682,11.227 -126.682,11.867
  Bottom Layer w1: T24.2@-157.035,106.441 -153.098,106.441 -151.955,107.584 -151.955,116.474 -152.844,117.363 T23.2@-157.035,117.363 ; D14.1@-138.747,16.476 -138.747,16.126 -137.188,14.567 -136.779,14.567 K4.C1@-136.588,14.376 ; K6.C1@-136.715,88.036 -136.588,88.036 -136.578,88.026 -134.175,88.026 -133.286,87.137 v2(-133.286,86.056) -133.286,74.825 ; K3.C1@-136.588,29.235 -134.662,29.235 ; K1.C1@-136.588,59.334 -134.299,59.334 -133.286,60.347 ; K5.C1@-136.588,73.685 -134.426,73.685 -133.286,74.825 ; K2.C1@-136.546,44.527 K2.C1@-136.588,44.485 -136.472,44.369 -133.286,44.369 ; K4.C1@-136.461,14.376 -134.178,14.376 ; v2(-133.152,27.891) v2@-133.286,28.025 ; v2(-132.87,12.143) -133.286,12.559 -133.286,13.484 ; -134.662,29.235 -134.496,29.235 ; -134.662,29.235 -133.286,30.611 ; -134.496,29.235 -133.307,29.235 -133.286,29.256 ; -134.496,29.235 v2@-133.286,28.025 ; -134.178,14.376 -133.286,13.484 ; -134.178,14.376 -133.286,15.268 ; -133.286,13.484 -133.286,15.268 ; -133.286,15.268 v2@-133.286,28.025 ; v2@-133.286,28.025 -133.286,29.256 ; -133.286,29.256 -133.286,30.611 ; -133.286,30.611 -133.286,44.369 ; -133.286,44.369 -133.286,60.347 ; -133.286,60.347 v2(-133.286,71.579) -133.286,74.825
IAN: C13.2 R37.2 U6.8 | length 57.1
  Top Layer w0.25: U6.8@-25.61,16.218 -25.61,12.141 -24.103,10.634 -18.832,10.634 -15.901,7.703 -15.901,-2.595 -14.577,-3.919 0.281,-3.919 8.286,-11.924 R37.2@8.286,-15.098
IAP: C3.2 R28.2 U6.7 | length 73.1
  Top Layer w0.25: U6.7@-26.11,16.218 -26.11,11.841 -24.453,10.184 -19.018,10.184 -16.351,7.517 -16.351,-2.781 -14.763,-4.369 -0.031,-4.369 4.636,-9.036 4.636,-27.798 6.748,-29.91 C3.2@8.319,-29.91
IBN: C21.2 R43.2 U6.12 | length 52.4
  Top Layer w0.25: U6.12@-23.886,17.442 -23.211,17.442 -21.203,15.434
  Top Layer w0.3: -21.203,15.434 -4.075,15.434
  Top Layer w0.35: -4.075,15.434 -1.587,17.922
  Top Layer w0.4: -1.587,17.922 -1.587,37.734
  Top Layer w0.45: -1.587,37.734 1.588,40.909
  Top Layer w0.5: 1.588,40.909 C21.2@5.525,40.909
IBP: C14.2 R38.2 U6.9 | length 42.3
  Top Layer w0.25: U6.9@-25.11,16.218 -25.11,15.283 -24.561,14.734
  Top Layer w0.3: -24.561,14.734 -3.632,14.734
  Top Layer w0.35: -3.632,14.734 -0.571,17.795
  Top Layer w0.4: -0.571,17.795 -0.571,25.669
  Top Layer w0.45: -0.571,25.669 1.969,28.209
  Top Layer w0.5: 1.969,28.209 R38.2@5.826,28.209
IRQ0-ADE: U6.29 U12.60 | length 24.3
  Top Layer w0.25: U12.60@-50.803,22.137 -49.11,22.137 -48.26,22.987 -38.155,22.987 -37.305,22.137 -32.932,22.137 -31.686,23.383 -29.154,23.383 -28.61,22.839 U6.29@-28.61,22.166
IRQ1-ADE: U6.32 U12.59 | length 21.9
  Top Layer w0.25: U12.59@-50.803,21.637 -48.721,21.637 -47.851,22.507 -38.312,22.507 -37.442,21.637 -32.988,21.637 -32.293,20.942 U6.32@-29.908,20.942
JTCK: P2.3 U12.76 | length 14.3
  Top Layer w0.3: U12.76@-52.483,31.317 -52.483,38.454 -48.504,42.433 P2.3@-46.926,42.433
JTDI: U12.77
JTMS: P2.2 U12.72 | length 16.9
  Top Layer w0.3: U12.72@-50.803,28.137 -49.079,28.137 -44.894,32.322 -44.894,39.385 -45.402,39.893 P2.2@-46.926,39.893
KEY1: KEY1.1 R26.2 U12.56 | length 157.5
  Top Layer w0.3: U12.56@-50.803,20.137 -47.569,20.137 v3(-46.863,19.431) ; R26.2@9.398,74.803 9.398,77.355 KEY1.1@9.688,77.645 ; KEY1.1@9.652,77.47 9.652,83.609 KEY1.1@9.688,83.645 ; KEY1.1@9.652,77.471 10.288,76.835 v3(10.922,76.835)
  Bottom Layer w0.3: v3(-46.863,19.431) -46.863,18.36 -50.919,14.304 -50.919,8.628 -48.514,6.223 -42.672,6.223 -40.513,4.064 -27.94,4.064 -25.019,6.985 -7.62,6.985 -7.493,7.112 0,7.112 3.048,10.16 3.048,26.621 3.224,26.797 3.253,26.797 3.429,26.973 3.429,50.673 7.747,54.991 7.747,58.674 13.081,64.008 13.081,74.676 v3(10.922,76.835)
KEY2: KEY2.1 R27.2 U12.57 | length 156
  Top Layer w0.3: U12.57@-50.803,20.637 -46.608,20.637 -46.29,20.955 v3(-46.101,20.955) ; KEY2.1@2.195,77.645 2.195,76.895 3.175,75.915 R27.2@3.175,74.549 ; KEY2.1@2.195,77.942 KEY2.1@2.195,83.645 ; KEY2.1@2.286,77.724 v3(4.064,77.724)
  Bottom Layer w0.3: v3(-46.101,20.955) -45.466,20.32 -45.466,19.05 -50.419,14.097 -50.419,9.779 -48.26,7.62 -42.418,7.62 -40.132,5.334 -39.116,5.334 -38.608,4.826 -28.194,4.826 -25.146,7.874 -12.319,7.874 -12.192,7.747 -1.27,7.747 2.032,11.049 2.032,66.294 -0.127,68.453 -0.127,73.914 3.683,77.724 v3(4.064,77.724)
KEY3: KEY3.1 R98.2 U12.58 | length 154
  Top Layer w0.3: U12.58@-50.803,21.137 -50.793,21.147 -48.195,21.147 -47.31,22.032 -45.419,22.032 -44.85,21.463 v3(-44.66,21.463) ; KEY3.1@-5.588,77.597 KEY3.1@-5.552,77.633 ; KEY3.1@-5.552,83.645 -5.552,75.7 -4.782,74.93 R98.2@-4.699,74.93 ; KEY3.1@-5.461,77.597 -5.207,77.851 v3(-3.937,77.851)
  Bottom Layer w0.3: v3(-44.66,21.463) -44.66,18.713 -49.784,13.589 -49.784,10.033 -48.387,8.636 -42.037,8.636 -39.243,5.842 -29.337,5.842 -26.416,8.763 -3.556,8.763 0.635,12.954 0.635,55.499 -5.207,61.341 -5.207,76.581 v3(-3.937,77.851)
M1: K1.M X1.1
M2: K2.M X2.1
M3: K3.M X3.1
M4: K4.M X4.1
M5: K6.M X6.1
M6: K5.M X5.1
MCU-o1: R47.1 U12.2 | length 66.4
  Top Layer w0.3: R47.1@-110.393,60.975 -106.108,60.975 -103.441,58.308 -103.441,42.972 -96.203,35.734 -73.703,35.734 -67.106,29.137 U12.2@-66.163,29.137
MCU-o2: R50.1 U12.3 | length 52
  Top Layer w0.3: R50.1@-110.707,47.036 -108.505,47.036 -96.503,35.034 -73.903,35.034 -67.506,28.637 U12.3@-66.357,28.637
MCU-o3: R51.1 U12.4 | length 48.2
  Top Layer w0.3: R51.1@-110.58,31.542 -110.53,31.542 -109.955,32.117 -109.955,32.167 -107.788,34.334 -74.103,34.334 -67.906,28.137 U12.4@-66.163,28.137
MCU-o4: R52.1 U12.5 | length 54
  Top Layer w0.3: R52.1@-110.298,15.794 -110.248,15.794 -108.406,17.636 -107.918,17.636 -91.884,33.67 -74.339,33.67 -68.306,27.637 U12.5@-66.163,27.637
MCU-o5: R53.1 U12.98 | length 92.8
  Top Layer w0.3: R53.1@-110.841,90.058 -108.648,90.058 -101.497,82.907 -101.497,48.228 -93.803,40.534 -71.403,40.534 -63.483,32.614 U12.98@-63.483,31.317
MCU-o6: R17.1 U12.1 | length 80.3
  Top Layer w0.3: R17.1@-110.714,75.23 -105.916,75.23 -102.503,71.817 -102.503,69.562 -102.503,43.134 -95.803,36.434 -73.503,36.434 -66.793,29.724 -66.793,29.647 -66.783,29.637 U12.1@-66.163,29.637
MCU-o7: R57.1 U12.89 | length 126.4
  Top Layer w0.3: v2(-67.117,67.517) -67.117,58.462 -58.983,50.328 U12.89@-58.983,31.317
  Top Layer w0.5: R57.1@-124.472,115.266 v2(-122.981,115.266)
  Bottom Layer w0.5: v2(-122.981,115.266) -121.029,115.266 -110.553,104.79 -110.553,93.487 -93.185,76.119 -70.453,76.119 -67.117,72.783 v2(-67.117,67.517)
MCU-o8: R58.1 U12.90 | length 122.9
  Top Layer w0.3: v2(-68.167,68.372) -68.167,58.805 -59.499,50.137 -59.499,32.227 -59.493,32.221 -59.493,31.327 U12.90@-59.483,31.317
  Top Layer w0.5: R58.1@-125.535,103.455 -124.044,103.455 -123.889,103.455 -123.889,103.533 -122.727,104.694 v2(-122.65,104.694)
  Bottom Layer w0.5: v2(-122.65,104.694) -122.574,104.618 -121.4,104.618 -120.237,103.455 -112.624,103.455 -111.703,102.534 -111.703,91.208 -95.914,75.419 -70.743,75.419 -68.167,72.843 v2(-68.167,68.372)
MISO-ADE: U6.37 U12.53 | length 22.3
  Top Layer w0.25: U12.53@-50.803,18.637 -48.657,18.637 -46.911,16.891 -43.18,16.891 -41.629,18.442 U6.37@-29.908,18.442
MISO-FREE: P4.3 U10.22 U12.79 | length 124.9
  Top Layer w0.3: P4.3@-63.182,123.713 -63.055,123.586 -63.055,121.997 -63.881,121.171 -63.881,109.601 -68.199,105.283 -68.199,81.661 -64.976,78.438 -64.976,70.524 -62.057,67.605 -61.466,67.014 -43.741,67.014 -42.209,65.482 -42.209,65.355 U10.22@-42.209,62.561 -42.209,59.767 -42.209,50.107 -43.86,48.456 -51.15,48.456 -53.983,45.623 U12.79@-53.983,31.317
MOSI-ADE: U6.38 U12.54 | length 26
  Top Layer w0.25: U12.54@-50.803,19.137 -48.196,19.137 -46.839,17.78 -44.341,17.78 -42.983,19.137 -40.377,19.137 -38.83,20.684 -33.203,20.684 v2(-32.403,19.884) ; v2(-32.703,17.514) -32.658,17.559 -31.828,17.559 -31.445,17.942 U6.38@-29.834,17.942
  Bottom Layer w0.762: v2(-32.703,17.514) -32.703,19.52 -32.403,19.82 v2(-32.403,19.884)
MOSI-FREE: P4.2 U10.21 U12.80 | length 121.6
  Top Layer w0.3: P4.2@-65.722,123.713 -65.722,122.189 -64.516,120.983 -64.516,110.363 -69.088,105.791 -69.088,81.534 -65.476,77.922 -65.476,70.317 -61.673,66.514 -45.908,66.514 -44.749,65.355 ; U12.80@-54.483,31.317 -54.483,45.83 -51.357,48.956 -45.511,48.956 -44.749,49.718 -44.749,59.767 U10.21@-44.749,62.561
  Top Layer w0.762: U10.21@-44.749,62.561 -44.749,65.355
Net1_1: 1.1 U13.2 | length 4.8
  Bottom Layer w0.6: 1.1@-94.551,95.293 -91.884,95.293 -91.376,95.801 U13.2@-91.376,97.185
Net2_1: 2.1 U13.4 | length 4.3
  Bottom Layer w0.5: 2.1@-89.604,101.135 -89.471,101.002 -89.471,99.738 -88.836,99.103 U13.4@-88.836,97.185
Net2_2: 2.2 U13.5 | length 4.3
  Bottom Layer w0.5: U13.5@-87.566,97.185 -87.566,98.976 -86.804,99.738 2.2@-86.804,101.135
NetC30_2: C30.2 R107.2 U9.5 | length 6.3
  Top Layer w0.61: U9.5@-43.003,-19.486 -42.998,-19.491 -38.828,-19.491 R107.2@-38.803,-19.516
  Top Layer w1.27: R107.2@-38.803,-19.516 C30.2@-38.803,-17.416
NetC32_1: C32.1 R112.1 | length 2.1
  Top Layer w0.762: C32.1@-36.103,-13.216 R112.1@-36.103,-11.116
NetC32_2: C32.2 C33.2 R110.2 U9.6 | length 15.5
  Top Layer w0.61: R110.2@-43.903,-13.216 -43.953,-13.216 -44.373,-13.636 -44.373,-13.686 -45.303,-14.616 -45.303,-17.316 -44.408,-18.211 -43.008,-18.211 U9.6@-43.003,-18.216 -41.103,-18.216 -40.103,-17.216 -40.103,-16.093 -39.746,-15.736 -39.223,-15.736 C33.2@-38.803,-15.316
  Top Layer w1.27: C33.2@-38.803,-15.316 C32.2@-38.803,-13.216